# Altium PCB PCB2.PcbDoc
Units mm, origin at the board's own origin, x right, y up, seen from the top; angles counter-clockwise.
Board outline 32.01 x 59.93 mm, 2 copper layers (Top Layer, Bottom Layer); 9 components, 10 nets, 32 pads, 0 vias.
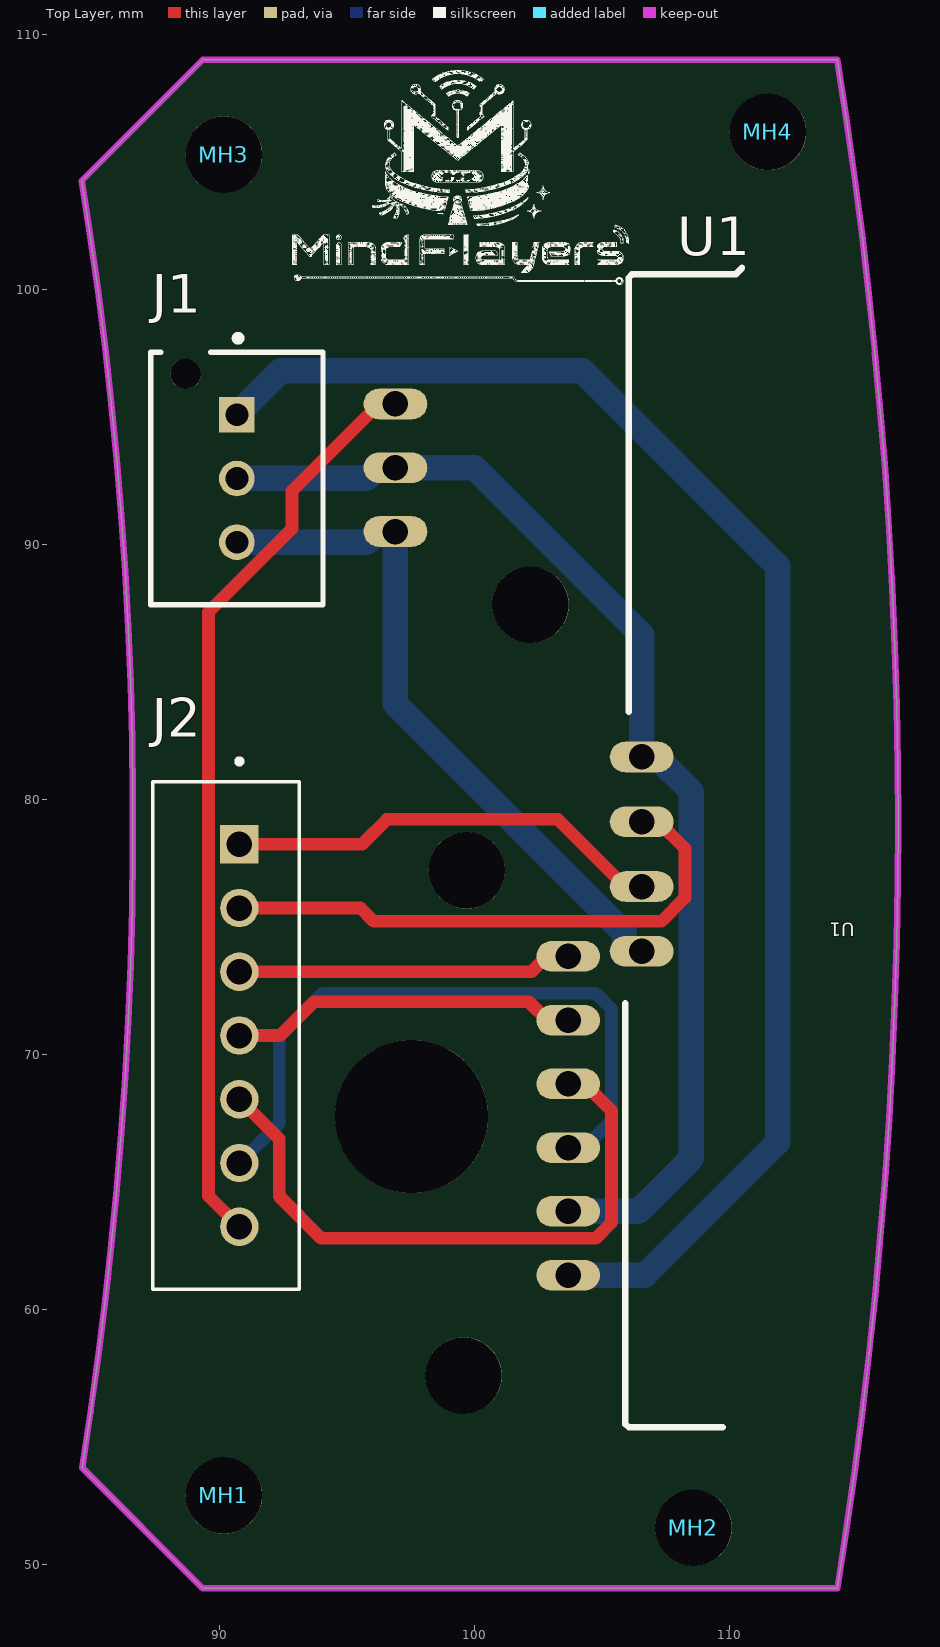
[diagram p0: Top Layer view]
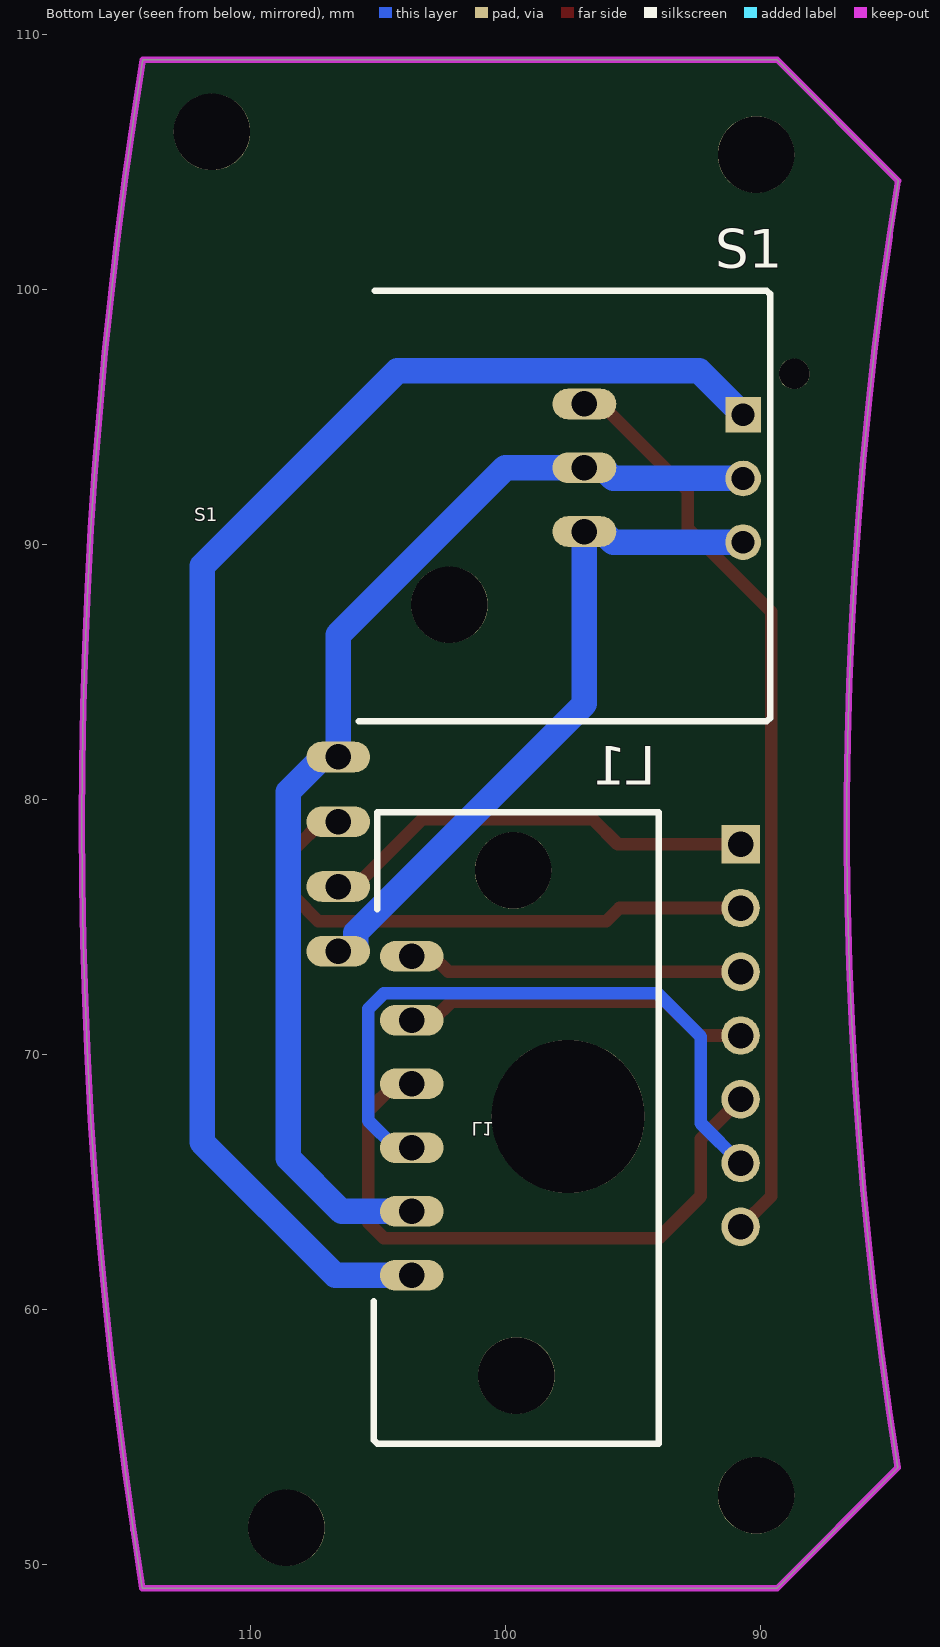
[diagram p1: Bottom Layer view, seen from below]
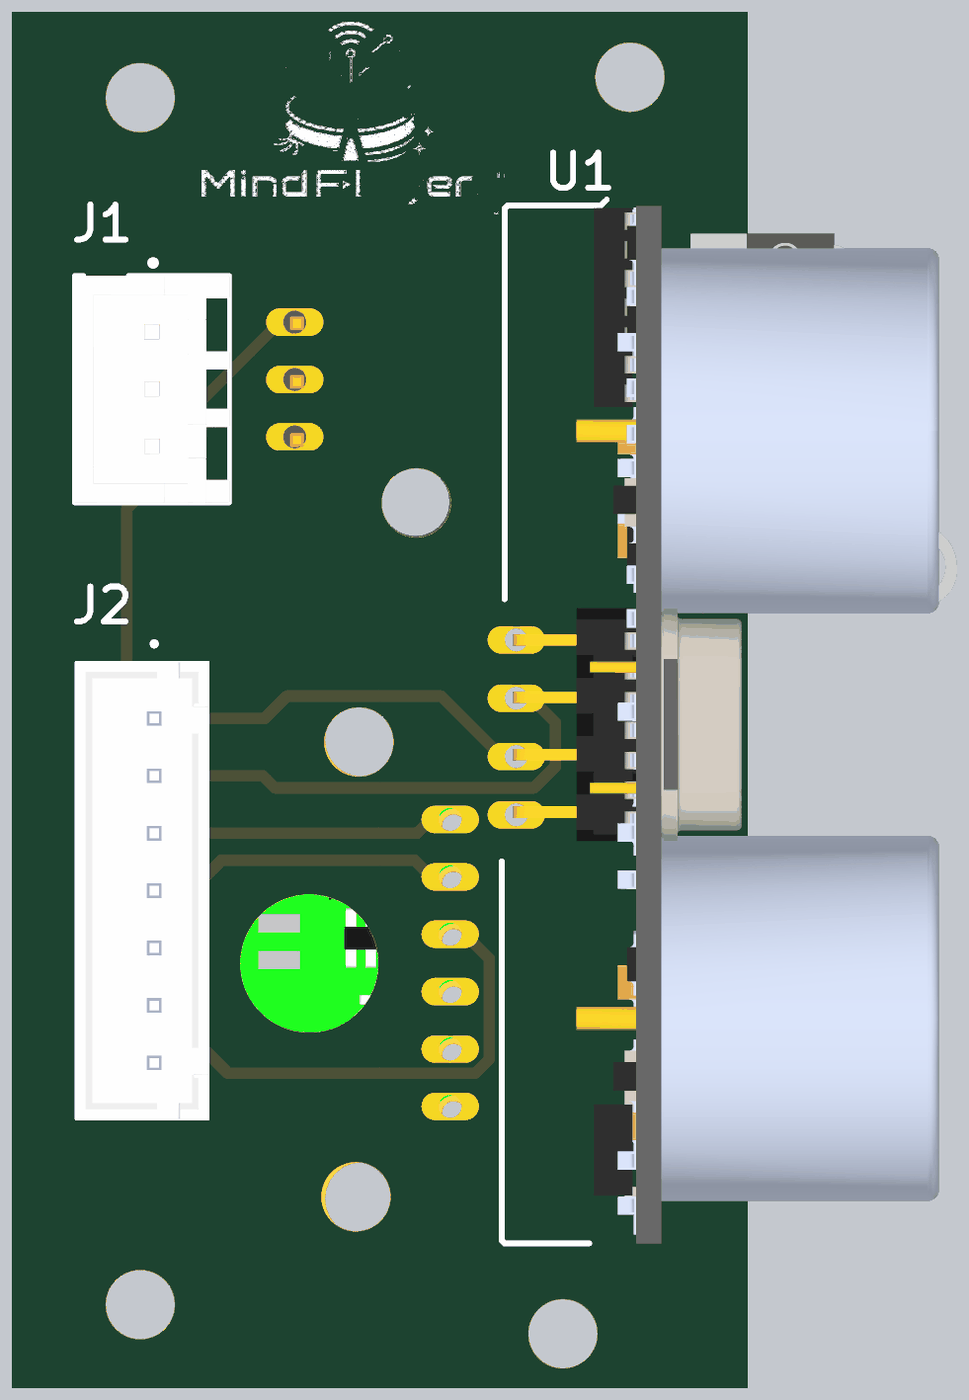
[diagram p2: 3D render of the assembled board from above, using the file's embedded part models]

## Layer stack, top to bottom
Top Solder: solder mask 0.0102, Solder Resist, Dk 3.5
Top Layer: signal copper 0.0356
Dielectric 1: dielectric 0.32, FR-4, Dk 4.8
Bottom Layer: signal copper 0.0356
Bottom Solder: solder mask 0.0102, Solder Resist, Dk 3.5

## Board outline
84.609,53.795 89.337,49.068 114.234,49.068 ccw(c-73.389,79.009) 114.226,108.999 89.338,108.999 84.603,104.264 cw(c-73.389,79.009)

## Design rules (kind name [scope] priority, off if disabled: settings)
Clearance [All] p1: gap=0.203 ignorepadtopadclearanceinfootprint=FALSE except(0.25: Arc-Hole Track-Hole SMDPad-Hole THPad-Hole Via-Hole Fill-Hole Poly-Hole Region-Hole Text-Hole)
HoleSize [All] p1: absolutevalues=TRUE maxlimit=6.3 minlimit=0.3 maxpercent=80.000 minpercent=20.000
PolygonConnect [All] p1: connectstyle=Relief reliefconductorwidth=0.254 reliefentries=4 polygonreliefangle="90 Angle" airgapwidth=0.254
RoutingVias [All] p1: holewidth=0.711 width=1.27 viastyle="Through Hole" minholewidth=0.711 minwidth=1.27 maxholewidth=0.711 maxwidth=1.27
SilkToSolderMaskClearance [IsPad] p1: minsilkscreentomaskgap=0.127 clearancetoexposedcopper=TRUE
SolderMaskExpansion [All] p1: expansion=0 istentingtop=FALSE
SupplyNets "Schematic Supply Nets_2" [InNet('3V3')] p1: voltage=0.000
SupplyNets "Schematic Supply Nets_1" [InNet('GND')] p2: voltage=0.000
SupplyNets "Schematic Supply Nets" [InNet('5V')] p3: voltage=0.000
Width [All] p1: maxlimit=25.4 minlimit=0.203 preferedwidth=0.203 minimp=50.000000 maximp=50.000000 favimp=50.000000
28 further rules are at their usual default settings.

## Components (designator, comment, footprint, x,y, rotation, side; value= is the part's Value field where it differs from the comment)
J1 "BH3B-XH-2(LF)(SN)" FP-BH3B-XH-2_LF_SN-MFG 90.678,92.583 r90 top
J2 "B7B-XH-A" JST_B7B-XH-A 90.253,70.739 r90 top
L1 "Laser" LASER_1 118.872,61.341 r180 bottom
MH1 "MH" MH 90.17,52.705 r0 top
MH2 "MH" MH 108.585,51.435 r0 top
MH3 "MH" MH 90.17,105.283 r0 top
MH4 "MH" MH 111.506,106.172 r0 top
S1 "switch" SWITCH 112.101,95.504 r180 bottom
U1 "Ultra" ULTRASOIC 106.553,74.041 r180 top

## Footprints (in the part's own frame and the unit in brackets; to place one, negate y for a bottom-side part, rotate by r counter-clockwise, add the part's x,y. Pads: shape width x height; smd on the part's side, far side on the other; paste and mask are expansions set on the pad)
FP-BH3B-XH-2_LF_SN-MFG [mm]
  rect 1.4x1.4 hole 0.9 paste-2539.97 mask+0: 1(2.5,0)
  round 1.4 hole 0.9 paste-2539.97 mask+0: 2(0,0) 3(-2.5,0)
  round 1.2 hole 1.2 unplated paste-2539.97 mask+0: ""(4.1,2)
  silkscreen extent -4.95,-3.37 5.62,3.37, body extent -5.05,-3.47 5.05,3.47, height 0.25
JST_B7B-XH-A [mm]
  rect 1.508x1.508 / inner round 1.508 / far side rect 1.508x1.508 hole 1: 1(7.5,-0.525)
  round 1.508 hole 1: 2(5,-0.525) 3(2.5,-0.525) 4(0,-0.525) 5(-2.5,-0.525) 6(-5,-0.525) 7(-7.5,-0.525)
  silkscreen extent -9.95,-2.88 10.85,2.88, body extent -9.95,-2.88 9.95,2.88, height 7
LASER_1 [mm]
  oval 2.5x1.2 hole 1: 1(15.2,0) 2(15.2,2.5) 3(15.2,5) 4(15.2,7.5) 5(15.2,10) 6(15.2,12.5)
  round 3 hole 3 paste-2539.97 mask-2539.97: 7(19.304,-3.937) 8(19.177,15.875)
  round 6 hole 6 paste-2539.97 mask-2539.97: 9(21.336,6.223)
  silkscreen extent 13.72,-6.6 24.89,18.16, body extent 13.55,-6.23 24.55,18.47, height 5.01
MH [mm]
  round 3 hole 3: 2(0,0)
SWITCH [mm]
  oval 2.5x1.2 hole 1: 1(15.2,-5) 2(15.2,-2.5) 3(15.2,0)
  round 3 hole 3: 4(9.906,-7.874)
  silkscreen extent 6.35,-12.45 22.48,4.44, body extent -13.67,-12.45 22.31,4.38, height 5.97
ULTRASOIC [mm]
  oval 2.5x1.2 hole 1: 1(0,0) 2(0,-2.54) 3(0,-5.08) 4(0,-7.62)
  silkscreen extent -3.94,-26.8 0.63,18.67, body extent -18.42,-26.53 0.13,18.67, height 20.61

## Part data
J1: library part CMP-17439-000649-1, "CONN HEADER VERT 3POS 2.5MM", Flammability Rating="UL94 V-0", Insulation Color=Natural, Max Operating Temperature=85°C, Min Operating Temperature=-25°C, Voltage Rating=250V, Connector Type=Header, Contact Finish - Mating=TIN, Contact Material=Brass, Contact Shape=Square, Contact Type="Male Pin", Fastening Type=Detent, Height=14.2mm, Insulation Material=Nylon, Lead Free="Lead Free", Length=9.9mm, Mated Stacking Heights=9.8mm, Mount="Through Hole", Number of Poles=3, Number of Positions=3, Number of Rows=1, Packaging=Bulk, Pitch=2.5mm, Series=XH, Termination=Press-Fit, Width=5.75mm
J2: "Connector Header Through Hole 7 position 0.098 (2.50mm)", Package=None, Check_prices=https://www.snapeda.com/parts/B7B-XH-A/JST+Sales+America+Inc./view-part/?ref=eda, MF="JST Sales", MP=B7B-XH-A, SnapEDA_Link=https://www.snapeda.com/parts/B7B-XH-A/JST+Sales+America+Inc./view-part/?ref=snap
L1: library part Laser_1
S1: library part Switch
U1: library part ULTRA

## Nets (pads, with @x,y where several pads share a name; then routed paths per layer and width w, separated by ;. In a path a pad name is that pad's centre, name@x,y a point inside that pad or via, vN(x,y) a via of type N, cw(c..) or ccw(c..) an arc to the next point about the centre after c; other vN are vias at no path point)
3V3: J1.1 L1.1 | length 58.1
  Bottom Layer w1: J1.1 92.402,96.807 104.234,96.807 111.887,89.154 111.887,66.548 106.68,61.341 L1.1
5V: J1.3 S1.1 U1.1 | length 27.2
  Bottom Layer w1: J1.3 95.776,90.083 96.197,90.504 S1.1 96.901,83.74 105.865,74.776 105.865,74.133 105.957,74.041 U1.1
GND: J1.2 L1.2 S1.2 U1.4 | length 46.1
  Bottom Layer w1: J1.2 95.776,92.583 96.197,93.004 S1.2 100.003,93.004 106.553,86.454 U1.4 107.149,81.661 108.506,80.304 108.506,65.925 106.422,63.841 L1.2
NetJ2_1: J2.1 U1.2 | length 17.3
  Top Layer w0.5: J2.1 95.591,78.239 96.568,79.216 103.268,79.216 105.903,76.581 U1.2
NetJ2_2: J2.2 U1.3 | length 22.1
  Top Layer w0.5: J2.2 95.526,75.739 96.049,75.216 107.327,75.216 108.256,76.145 108.256,78.068 107.203,79.121 U1.3
NetJ2_3: J2.3 L1.6 | length 13.1
  Top Layer w0.5: J2.3 102.231,73.239 102.833,73.841 L1.6
NetJ2_4: J2.4 L1.5 | length 13.7
  Top Layer w0.5: J2.4 92.385,70.739 93.71,72.064 102.124,72.064 102.847,71.341 L1.5
NetJ2_5: J2.5 L1.4 | length 24.9
  Top Layer w0.5: J2.5 92.34,66.677 92.34,64.434 93.986,62.788 104.758,62.788 105.375,63.405 105.375,67.788 104.322,68.841 L1.4
NetJ2_6: J2.6 L1.3 | length 26.1
  Bottom Layer w0.5: J2.6 92.34,67.301 92.34,70.694 94.04,72.394 104.758,72.394 105.375,71.777 105.375,67.394 104.322,66.341 L1.3
NetJ2_7: J2.7 S1.3 | length 36.2
  Top Layer w0.5: J2.7 89.571,64.446 89.571,87.345 92.844,90.618 92.844,92.097 96.251,95.504 S1.3
pads on no net: J1. L1.7 L1.8 L1.9 MH1.2 MH2.2 MH3.2 MH4.2 S1.4

## Keep-outs
Keep-Out Layer:
  the board outline again, w0.254

## Silkscreen, mask and mechanical layers (free items; w line width, h text height)
Top Overlay:
  drawing of 100 lines, arcs and shapes, not listed